# Altium PCB PCB1.PcbDoc
Units mm, origin at the board's own origin, x right, y up, seen from the top; angles counter-clockwise.
Board outline 40.64 x 48.39 mm, 2 copper layers (Top Layer, Bottom Layer); 40 components, 36 nets, 180 pads, 25 vias.
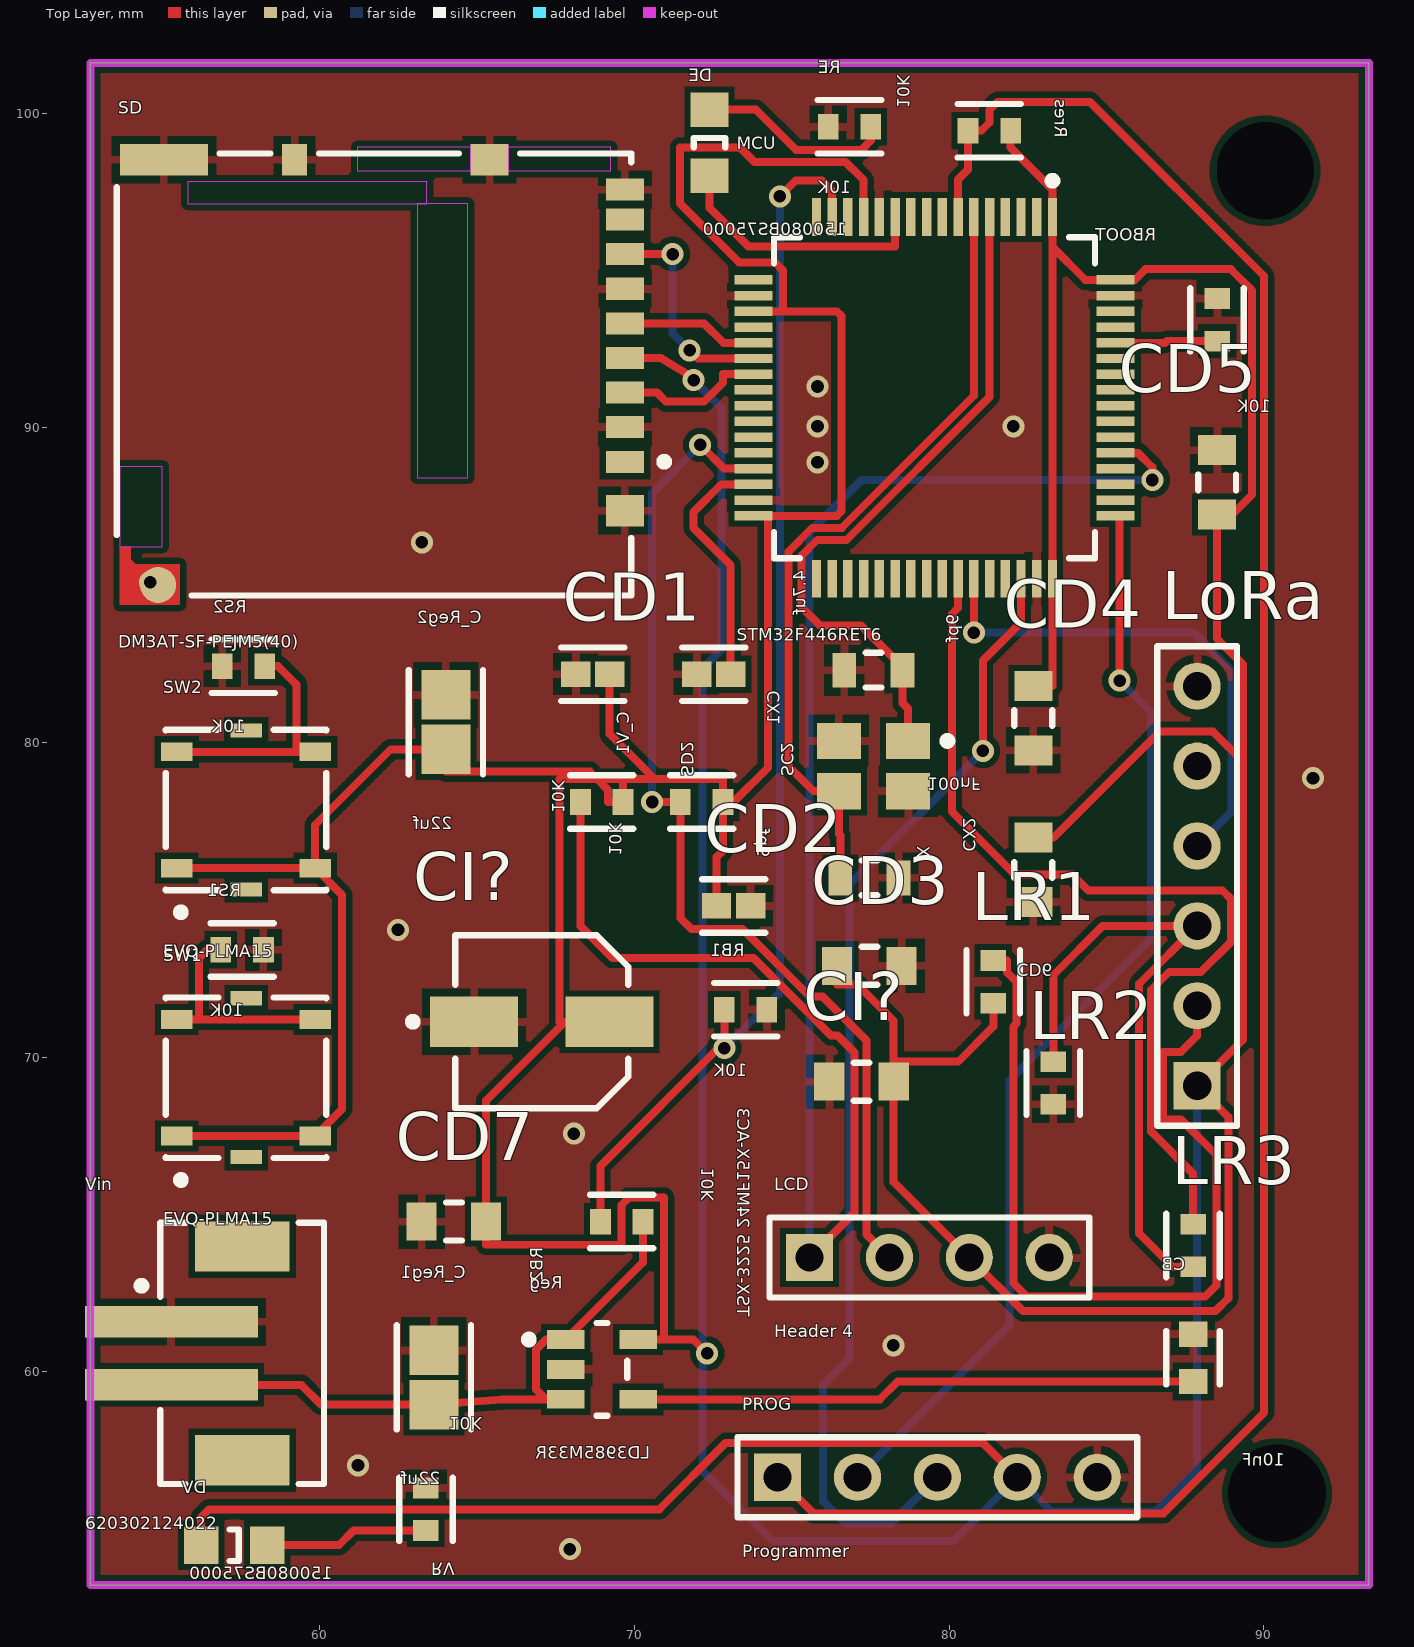
[diagram p0: Top Layer view]
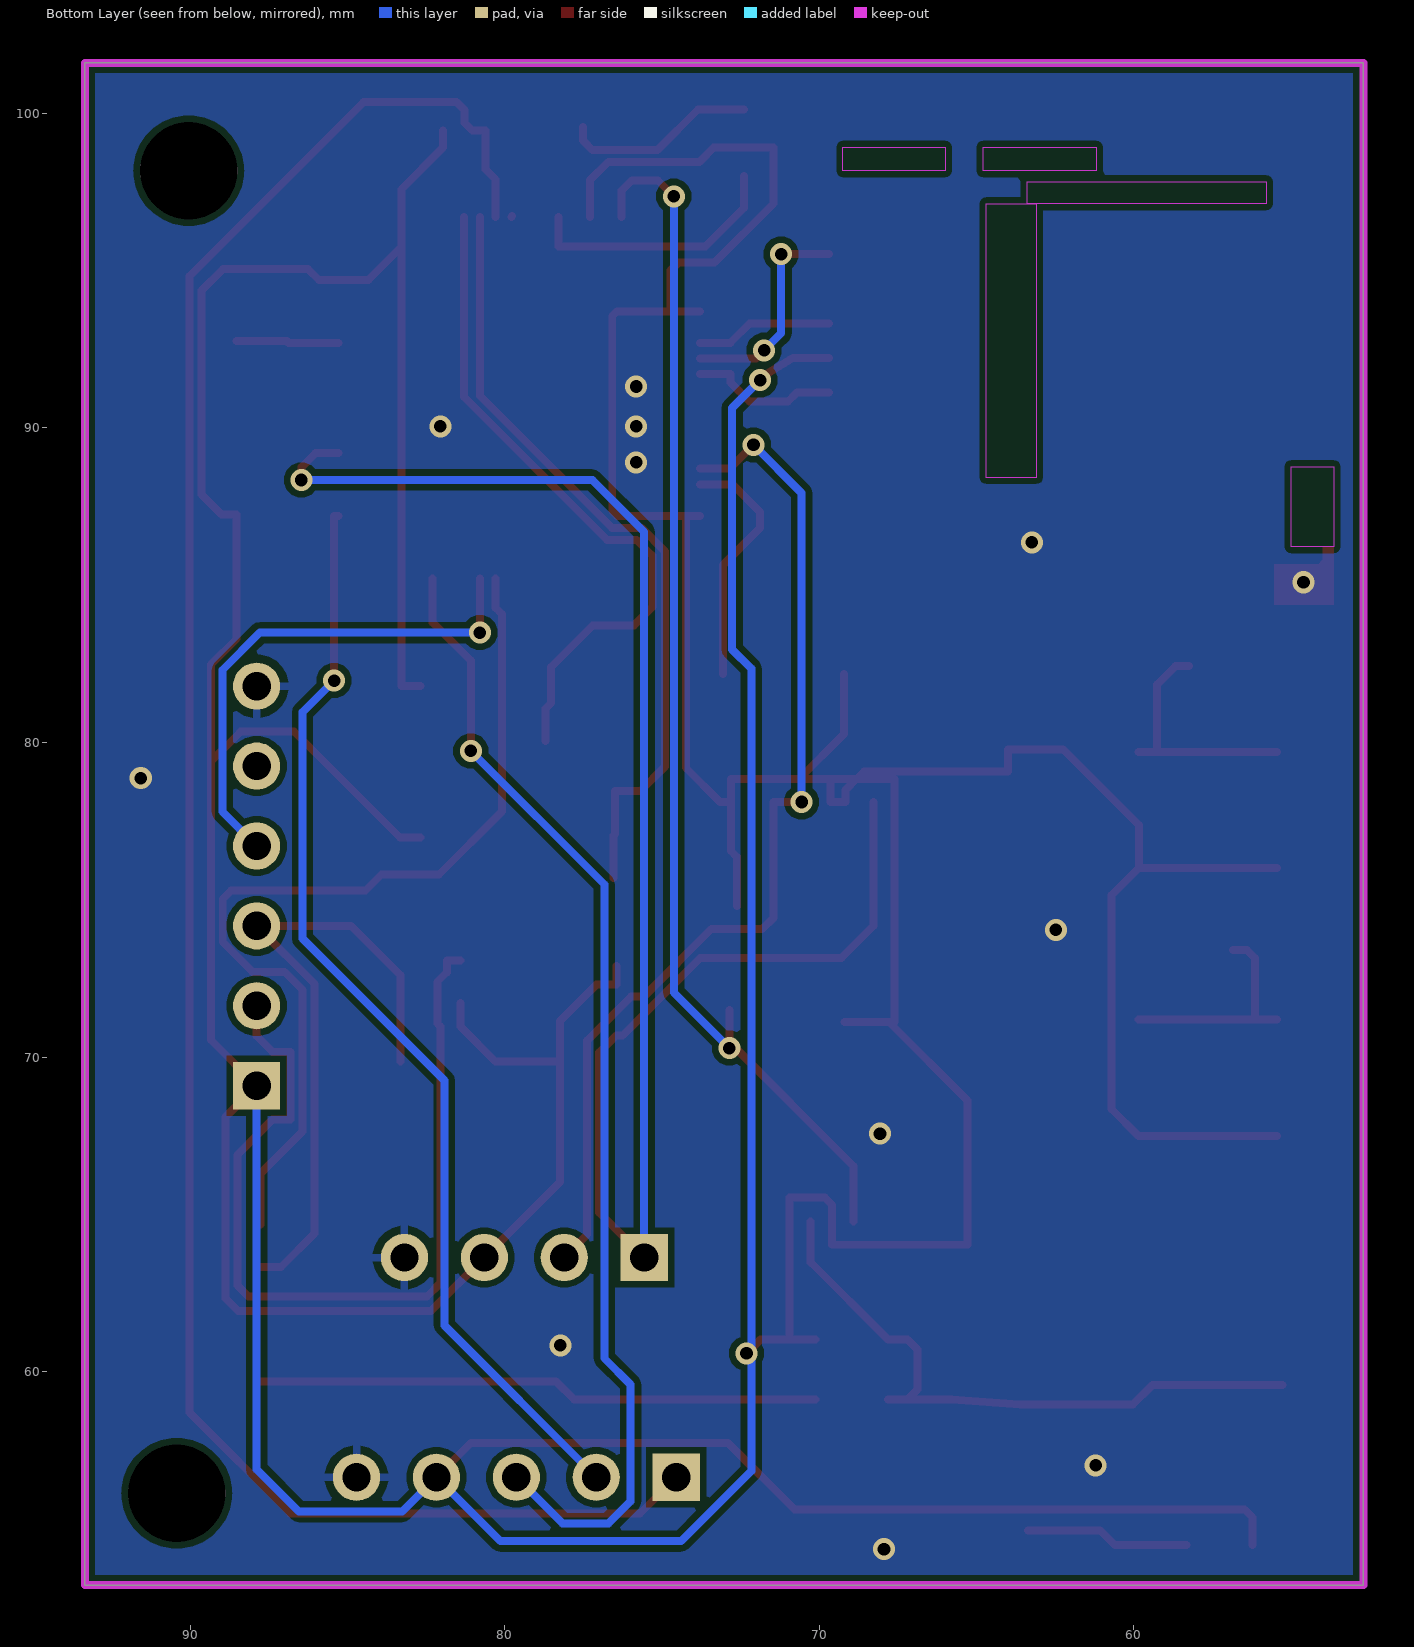
[diagram p1: Bottom Layer view, seen from below]
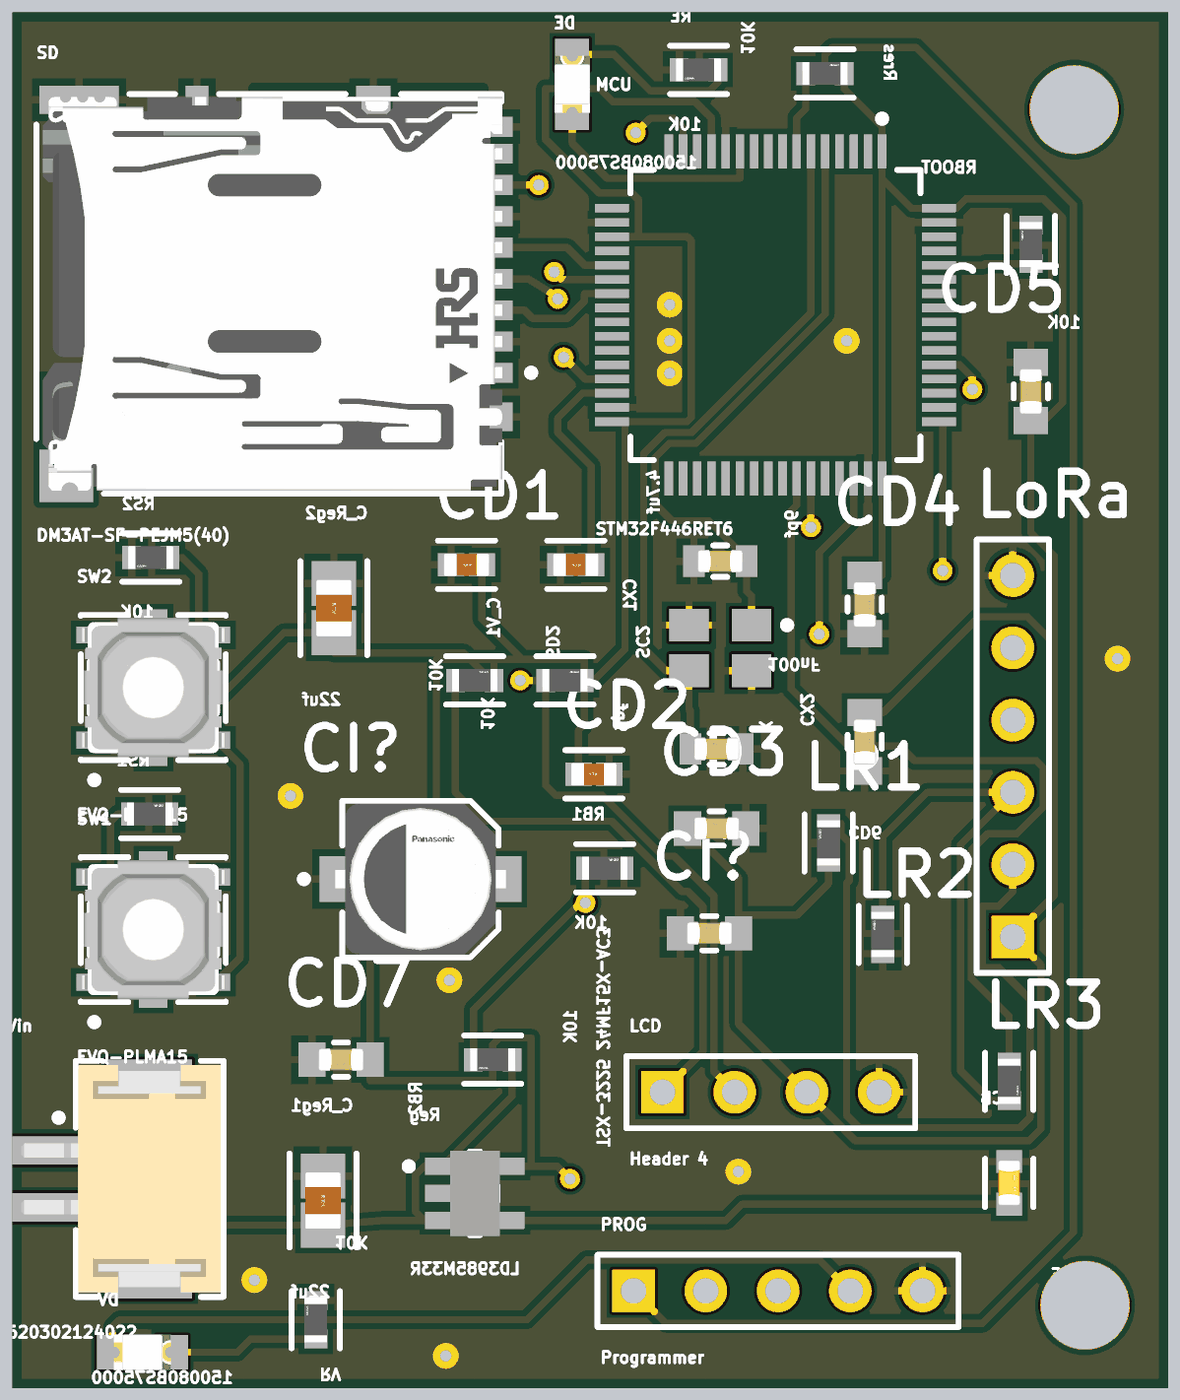
[diagram p2: 3D render of the assembled board from above, using the file's embedded part models]

## Layer stack, top to bottom
Top Solder: solder mask 0.0102, Solder Resist, Dk 3.5
Top Layer: signal copper 0.0356
Dielectric 1: dielectric 0.32, FR-4, Dk 4.8
Bottom Layer: signal copper 0.0356
Bottom Solder: solder mask 0.0102, Solder Resist, Dk 3.5

## Board outline
52.705,53.213 93.345,53.213 93.345,101.6 52.705,101.6

## Design rules (kind name [scope] priority, off if disabled: settings)
Clearance [All] p1: gap=0.2 ignorepadtopadclearanceinfootprint=FALSE except(0.127: Arc-Arc Arc-Track Track-Track SMDPad-SMDPad)
PolygonConnect [All] p1: connectstyle=Relief reliefconductorwidth=0.254 reliefentries=4 polygonreliefangle="90 Angle" airgapwidth=0.254
RoutingVias [All] p1: holewidth=0.4 width=0.7 viastyle="Through Hole" minholewidth=0.4 minwidth=0.7 maxholewidth=0.4 maxwidth=0.7
SolderMaskExpansion [All] p1: expansion=0.102 istentingtop=FALSE
Width [All] p1: maxlimit=0.5 minlimit=0.254 preferedwidth=0.254
30 further rules are at their usual default settings.

## Components (designator, comment, footprint, x,y, rotation, side; value= is the part's Value field where it differs from the comment)
C_Reg1 "22uf" FP-C2012-125-0_2-IPC_A 63.627,59.817 r270 top
C_Reg2 "22uf" FP-C2012-125-0_2-IPC_A 64.008,80.645 r270 top
C_V1 "4.7uf" FP-C1608-080-0_1-IPC_C 72.517,82.169 r180 top
CB "10nF" FP-CC0603-DA-MFG 87.757,60.44 r90 top value="10 nF"
CD1 "4.7uf" FP-C1608-080-0_1-IPC_C 68.674,82.169 r180 top
CD2 "4.7uf" FP-C1608-080-0_1-IPC_C 73.152,74.803 r0 top
CD3 "100nF" FP-CGA3E-0_3-0_1-IPC_A 77.47,72.898 r0 top
CD4 "100nF" FP-CGA3E-0_3-0_1-IPC_A 82.677,80.772 r270 top
CD5 "100nF" FP-CGA3E-0_3-0_1-IPC_A 88.519,88.265 r90 top
CD6 "100nF" FP-CGA3E-0_3-0_1-IPC_A 82.677,75.946 r270 top
CD7 "100nF" FP-CGA3E-0_3-0_1-IPC_A 64.262,64.77 r180 top
CI? "10uF" FP-SC-MFG 67.056,71.12 r0 top
CI? "100nF" FP-CGA3E-0_3-0_1-IPC_A 77.216,69.215 r0 top
CX1 "9pf" FP-CGA3E-0_3-0_1-IPC_B 77.597,82.296 r180 top
CX2 "9pf" FP-CGA3E-0_3-0_1-IPC_B 77.47,75.692 r0 top
DE "150080BS75000" 0805_A 72.39,99.06 r270 top
DV "150080BS75000" 0805_A 57.277,54.483 r180 top
LCD "Header 4" HDR1X4 75.565,63.627 r0 top
LoRa "Header 6" HDR1X6 87.884,69.088 r90 top
LR1 "10K" FP-RC0603-0_55-IPC_C 81.407,72.39 r90 top
LR2 "10K" FP-RC0603-0_55-IPC_C 83.312,69.173 r90 top
LR3 "4.7K" FP-RC0603-0_55-IPC_C 87.757,64.008 r270 top
MCU "STM32F446RET6" FP-LQFP64-5W-MFG 79.537,90.952 r270 top
PROG "Programmer" HDR1X5 74.549,56.642 r0 top
RB1 "10K" FP-RC0603-0_55-IPC_C 73.533,71.501 r0 top
RB2 "10K" FP-RC0603-0_55-IPC_C 69.596,64.77 r180 top
RBOOT "10K" FP-RC0603-0_55-IPC_C 88.519,93.43 r90 top
RE "10K" FP-RC0603-0_55-IPC_C 76.835,99.568 r180 top
Reg "LD3985M33R" FP-SOT23-5L-7049676-MFG 68.968,60.071 r0 top
Rres "10K" FP-RC0603-0_55-IPC_C 81.28,99.441 r0 top
RS1 "10K" FP-RC0603-0_55-IPC_C 57.531,73.406 r0 top
RS2 "10K" FP-RC0603-0_55-IPC_C 57.573,82.423 r180 top
RV "10K" FP-RC0603-0_55-IPC_C 63.373,55.626 r90 top
SC2 "10K" FP-RC0603-0_55-IPC_C 72.136,78.105 r0 top
SD "DM3AT-SF-PEJM5(40)" FP-DM3AT-SF-PEJM5_40-MFG 61.722,91.694 r270 top
SD2 "10K" FP-RC0603-0_55-IPC_C 68.961,78.105 r0 top
SW1 "EVQ-PLMA15" FP-EVQ-PLMA15-MFG 57.658,69.342 r90 top
SW2 "EVQ-PLMA15" FP-EVQ-PLMA15-MFG 57.658,77.851 r90 top
Vin "620302124022" 620302124022 57.531,60.579 r90 top
X "TSX-3225 24MF15X-AC3" EPSON-TSX-3225_V 77.597,79.248 r180 top

## Footprints (in the part's own frame and the unit in brackets; to place one, negate y for a bottom-side part, rotate by r counter-clockwise, add the part's x,y. Pads: shape width x height; smd on the part's side, far side on the other; paste and mask are expansions set on the pad)
0805_A [mm] "Chip LED, 2-Leads, Body 2.0x1.3mm, IPC Medium Density"
  rect 1.1x1.2 smd: 1(-1.05,0) 2(1.05,0)
  silkscreen extent -0.15,-0.5 0.15,0.5, body extent -1,-0.63 1,0.63, height 0.68
620302124022 [mm] "2.00mm SMT Male Vertical Shrouded Header, 2p"
  rect 1x5.5 smd: 1(1,2.25) 2(-1,2.25)
  rect 1.6x3 smd: MP1(-3.4,0) MP2(3.4,0)
  silkscreen extent -4.15,-2.6 4.15,3.32, body extent -4,-2.5 4,4.51, height 6.77
EPSON-TSX-3225_V [mm] "SMD, 4-Leads, Body 3.2x2.5mm"
  rect 1.4x1.15 smd: 1(-1.1,-0.8) 2(1.1,-0.8) 3(1.1,0.8) 4(-1.1,0.8)
  silkscreen extent -2.48,-0.92 -2.23,-0.68, body extent -1.6,-1.25 1.6,1.25, height 0.6
FP-C1608-080-0_1-IPC_C [mm]
  rect 0.931x0.812 smd paste+0 mask+0: 1(-0.541,0) 2(0.541,0)
  silkscreen extent -1.01,-0.85 1.01,0.85, body extent -0.8,-0.4 0.8,0.4, height 0.9
FP-C2012-125-0_2-IPC_A [mm]
  rect 1.578x1.556 smd paste+0 mask+0: 1(-0.864,0) 2(0.864,0)
  silkscreen extent -1.65,-1.18 1.65,1.18, body extent -1,-0.63 1,0.63, height 1.45
FP-CC0603-DA-MFG [mm]
  rect 0.8x0.9 smd paste+0 mask+0: 1(-0.75,0) 2(0.75,0)
  silkscreen extent -0.85,-0.85 0.85,0.85, body extent -0.8,-0.4 0.8,0.4, height 0.9
FP-CGA3E-0_3-0_1-IPC_A [mm]
  rect 0.956x1.206 smd paste+0 mask+0: 1(-1.025,0) 2(1.025,0)
  silkscreen extent -0.25,-0.6 0.25,0.6, body extent -2,-1.1 2,1.1, height 0.25
FP-CGA3E-0_3-0_1-IPC_B [mm]
  rect 0.756x1.106 smd paste+0 mask+0: 1(-0.925,0) 2(0.925,0)
  silkscreen extent -0.25,-0.55 0.25,0.55, body extent -0.8,-0.4 0.8,0.4, height 1.1
FP-DM3AT-SF-PEJM5_40-MFG [mm]
  rect 0.7x1.2 smd paste+0 mask+0: 1(2.775,7.975) 2(1.675,7.975) 3(0.575,7.975) 4(-0.525,7.975) 5(-1.625,7.975) 6(-2.725,7.975) 7(-3.825,7.975) 8(-4.925,7.975) 9(-5.875,7.975)
  rect 1x0.8 smd paste+0 mask+0: 10(-6.825,-2.525)
  rect 1x1.2 smd paste+0 mask+0: 11(4.325,7.975) 12(-6.825,3.675)
  rect 1x2.8 smd paste+0 mask+0: 13(-6.825,-6.675)
  round 1.145 smd paste+0 mask+0: 14(6.689,-6.861)
  Top Layer region: 6.025,-6.175 7.325,-6.175 7.325,-8.075 5.475,-8.075 5.475,-7.725 5.875,-7.725 6.025,-7.575 6.025,-6.175
  Keep-Out Layer region: -7.225,4.275 -6.475,4.275 -6.475,7.525 -7.225,7.525
  Keep-Out Layer region: -7.225,-0.525 -6.475,-0.525 -6.475,3.075 -7.225,3.075
  Keep-Out Layer region: -6.125,-5.925 -5.425,-5.925 -5.425,1.675 -6.125,1.675
  Keep-Out Layer region: -5.425,1.375 3.275,1.375 3.275,2.975 -5.425,2.975
  Keep-Out Layer region: 2.925,-8.075 5.475,-8.075 5.475,-6.725 2.925,-6.725
  silkscreen extent -7.02,-8.17 7.02,9.35, body extent -6.93,-7.95 6.92,8.2, height 1.68
FP-EVQ-PLMA15-MFG [mm]
  rect 0.45x1 smd paste+0 mask+0: 1(-2.525,0) 2(2.525,0)
  rect 0.6x1 smd paste+0 mask+0: A(-1.85,2.2) A'(-1.85,-2.2) B(1.85,2.2) B'(1.85,-2.2)
  silkscreen extent -3.37,-2.55 2.55,2.55, body extent -2.85,-2.8 2.85,2.8, height 0.25
FP-LQFP64-5W-MFG [mm]
  rect 1.2x0.3 smd paste+0 mask+0: 1(-5.75,3.75) 2(-5.75,3.25) 3(-5.75,2.75) 4(-5.75,2.25) 5(-5.75,1.75) 6(-5.75,1.25) 7(-5.75,0.75) 8(-5.75,0.25) 9(-5.75,-0.25) 10(-5.75,-0.75) 11(-5.75,-1.25) 12(-5.75,-1.75) 13(-5.75,-2.25) 14(-5.75,-2.75) 15(-5.75,-3.25) 16(-5.75,-3.75) 33(5.75,-3.75) 34(5.75,-3.25) 35(5.75,-2.75) 36(5.75,-2.25) 37(5.75,-1.75) 38(5.75,-1.25) 39(5.75,-0.75) 40(5.75,-0.25) 41(5.75,0.25) 42(5.75,0.75) 43(5.75,1.25) 44(5.75,1.75) 45(5.75,2.25) 46(5.75,2.75) 47(5.75,3.25) 48(5.75,3.75)
  rect 0.3x1.2 smd paste+0 mask+0: 17(-3.75,-5.75) 18(-3.25,-5.75) 19(-2.75,-5.75) 20(-2.25,-5.75) 21(-1.75,-5.75) 22(-1.25,-5.75) 23(-0.75,-5.75) 24(-0.25,-5.75) 25(0.25,-5.75) 26(0.75,-5.75) 27(1.25,-5.75) 28(1.75,-5.75) 29(2.25,-5.75) 30(2.75,-5.75) 31(3.25,-5.75) 32(3.75,-5.75) 49(3.75,5.75) 50(3.25,5.75) 51(2.75,5.75) 52(2.25,5.75) 53(1.75,5.75) 54(1.25,5.75) 55(0.75,5.75) 56(0.25,5.75) 57(-0.25,5.75) 58(-0.75,5.75) 59(-1.25,5.75) 60(-1.75,5.75) 61(-2.25,5.75) 62(-2.75,5.75) 63(-3.25,5.75) 64(-3.75,5.75)
  silkscreen extent -7.02,-5.1 5.1,5.1
FP-RC0603-0_55-IPC_C [mm]
  rect 0.659x0.812 smd paste+0 mask+0: 1(-0.677,0) 2(0.677,0)
  silkscreen extent -1.01,-0.85 1.01,0.85, body extent -1.11,-0.55 1.11,0.55, height 0.25
FP-SC-MFG [mm]
  rect 2.8x1.6 smd paste+0 mask+0: 1(-2.15,0) 2(2.15,0)
  silkscreen extent -4.22,-2.75 2.75,2.75, body extent -3.8,-3 3.8,3, height 0.25
FP-SOT23-5L-7049676-MFG [mm]
  rect 1.2x0.6 smd paste+0 mask+0: 1(-1.15,0.95) 2(-1.15,0) 3(-1.15,-0.95) 4(1.15,-0.95) 5(1.15,0.95)
  silkscreen extent -2.45,-1.47 0.8,1.47, body extent -0.87,-1.5 0.88,1.5, height 1.45
HDR1X4 [mm] "Connector; Header; 4 Position"
  rect 1.5x1.5 hole 0.9: 1(0,0)
  round 1.5 hole 0.9: 2(2.54,0) 3(5.08,0) 4(7.62,0)
  silkscreen extent -1.27,-1.27 8.89,1.27
HDR1X5 [mm] "Connector; Header; 5 Position"
  rect 1.5x1.5 hole 0.9: 1(0,0)
  round 1.5 hole 0.9: 2(2.54,0) 3(5.08,0) 4(7.62,0) 5(10.16,0)
  silkscreen extent -1.27,-1.27 11.43,1.27
HDR1X6 [mm] "Connector; Header; 6 Position"
  rect 1.5x1.5 hole 0.9: 1(0,0)
  round 1.5 hole 0.9: 2(2.54,0) 3(5.08,0) 4(7.62,0) 5(10.16,0) 6(12.7,0)
  silkscreen extent -1.27,-1.27 13.97,1.27

## Part data
C_Reg1 C_Reg2: library part CMP-08246-007072-1, "Multilayer Ceramic Capacitors 22μF ±20% 16V X6S SMD 0805", Capacitance=22uF, Case Code (Imperial)=0805, Case Code (Metric)=2012, Dielectric=X6S, Dielectric Material=Ceramic, Max Operating Temperature=105°C, Min Operating Temperature=-55°C, Package Quantity=2000, Tolerance=20%, Voltage Rating=16V, Case/Package=0805, Height=1.25mm, Lead Free="Lead Free", Length=0.079inch, Mount="Surface Mount", Packaging="Tape and Reel", REACH SVHC="No SVHC", RoHS Compliant=Yes, Series=C, Termination=SMD/SMT, Thickness=0.057inch, Voltage Rating (DC)=16V, Weight=0.000194oz, Width=0.049inch
C_V1 CD1 CD2: library part CMP-2000-04981-2, "Multilayer Ceramic Capacitors 4.7μF ±10% 16V X5R SMD 0603", Capacitance=4.7uF, Case Code (Imperial)=0603, Case Code (Metric)=1608, Dielectric=X5R, Dielectric Material=Ceramic, Max Operating Temperature=85°C, Min Operating Temperature=-55°C, Package Quantity=1, Tolerance=10%, Voltage=16V, Case/Package=0603, Construction=Flat, Depth=0.8mm, Height=0.8mm, Lead Free="Lead Free", Length=1.6mm, Mount="Surface Mount", Packaging="Tape and Reel", REACH SVHC="No SVHC", RoHS Compliant=Yes, Series=C, Termination=SMD/SMT, Thickness=0.035inch, Voltage Rating=16V, Voltage Rating (DC)=16V, Weight=7.1E-05oz, Width=0.031inch
CB: library part CMP-2100-03600-2, "CAP CER 10000PF 50V X7R 0603", Capacitance="10 nF", Manufacturer=YAGEO, Manufacturer Part Number=CC0603KRX7R9BB103, Package=CC0603-DA, Temperature="-55°C to +125°C", Temperature Characteristic=X7R, Temperature Coefficient=15%, Temperature Range High=+125°C, Temperature Range Low=-55°C, Tolerance=0.1, Voltage="50 V", Automotive=No, Category=Cap, ComponentLink2Description=Datasheet, ComponentLink2URL=http://www.yageo.com/documents/recent/UPY-GPHC_X7R_6.3V-to-50V_18.pdf, Device Class L1="Passive Components", Device Class L2=Capacitors, Device Class L3="Ceramic Capacitors", Digikey Description="CAP CER 10000PF 50V X7R 0603", Footprint Url=http://www.yageo.com/exep/pages/download/literatures/UPY-C_GEN_24.pdf, Height=0.9mm, Lead Free=Yes, Material=Ceramic, Mouser Description="Multilayer Ceramic Capacitor, CC Series, 0.01 - F, - 10%, X7R, 50 V, 0603 [1608 Metric]", Octopart=https://octopart.com/cc0603krx7r9bb103-yageo-192938, RoHS=TRUE, Voltage Rating="50 V"
CD3 CD4 CD5 CD6 CD7 CI?: library part CMP-2000-07546-2, "Cap Ceramic 100nF 50V X7R 10% Pad SMD 0603 +125°C Automotive T/R", Case Code (Imperial)=0603, Case Code (Metric)=1608, Dielectric=X7R, Max Operating Temperature=125°C, Min Operating Temperature=-55°C, Package Quantity=1, Ratings=AEC-Q200, Tolerance=10%, Voltage=50V, Capacitance=100nF, Case/Package=0603, Composition=Ceramic, Depth=0.8mm, Height=0.8mm, Lead Free="Lead Free", Length=1.6mm, Mount="Surface Mount", Packaging="Tape and Reel", Radiation Hardening=No, REACH SVHC="No SVHC", Termination=SMD/SMT, Thickness=0.035inch, Voltage Rating=50V, Voltage Rating (DC)=50V, Weight=7.1E-05oz, Width=0.8mm
CI?: library part CMP-05427-000087-1, "CAP ALUM 10UF 20% 35V SMD", Case/Package=Radial, Leakage Current=3uA, Max Operating Temperature=85°C, Min Operating Temperature=-40°C, Package Quantity=1, Ripple Current=30mA, Tolerance=20%, Voltage=35V, Capacitance=10uF, Construction=Cylindrical, Contact Plating=Tin, Diameter=5mm, Height=5.4mm, Height - Seated (Max)=0.213inch, Lead Length=2.2mm, Lead Pitch=1.5mm, Length=5.5mm, Life (Hours)=2000Hour, Mount="Surface Mount", Number of Pins=2, Packaging="Tape and Reel", Radiation Hardening=No, REACH SVHC="No SVHC", Ripple Current (AC)=30mA, RoHS Compliant=Yes, Series=S, Termination=SMD/SMT, Voltage Rating=35V, Voltage Rating (DC)=35V, Width=5.3mm
CX1 CX2: library part CMP-08246-000963-1, "Cap Ceramic 9pF 50V C0G 0.5pF Pad SMD 0603 +125°C Automotive T/R", Capacitance=9pF, Case Code (Imperial)=0603, Case Code (Metric)=1608, Dielectric=C0G, Max Operating Temperature=125°C, Min Operating Temperature=-55°C, Package Quantity=4000, Ratings=AEC-Q200, Voltage Rating=50V, Case/Package=0603, Composition=Ceramic, Depth=0.8mm, Height=0.8mm, Length=1.6mm, Mount="Surface Mount", Packaging="Tape and Reel", REACH SVHC="No SVHC", Termination=SMD/SMT, Thickness=0.035inch, Voltage Rating (DC)=50V, Weight=7.1E-05oz, Width=0.031inch
DE DV: library part CMP-1426-00008-1, "SMD mono-color Chip LED, WL-SMCW, Blue", Color=Blue, Manufacturer="Wuerth Elektronik", ComponentLink1Description="Manufacturer URL", ComponentLink1URL=http://www.we-online.com, ComponentLink2Description=Datasheet, ComponentLink2URL=http://katalog.we-online.com/led/datasheet/150080BS75000.pdf, PackageReference=0805_A, PartNumber=150080BS75000
LCD: "Header, 4-Pin", LatestRevisionDate=17-Jul-2002, LatestRevisionNote="Re-released for DXP Platform.", Publisher="Altium Limited"
LoRa: "Header, 6-Pin", LatestRevisionDate=17-Jul-2002, LatestRevisionNote="Re-released for DXP Platform.", Publisher="Altium Limited"
LR1 LR2 LR3 RB1 RB2 RBOOT RE Rres RS1 RS2 RV SC2 SD2: library part CMP-2100-03664-2, "RES 10K OHM 1% 1/10W 0603", Case Code (Imperial)=0603, Case Code (Metric)=1608, Max Operating Temperature=155°C, Max Power Dissipation=100mW, Min Operating Temperature=-55°C, Resistance=10kR, Resistance Tolerance=1%, Resistor Type="Thick Film", Temperature Coefficient=100ppm/°C, Voltage Rating=75V, Voltage Rating (DC)=50V, Case/Package=0603, Construction=Rectangular, Depth=0.8mm, Features="Moisture Resistant", Height=0.45mm, Lead Free="Lead Free", Lead Pitch=0.3mm, Length=1.6mm, Military Standard=Not, Number of Pins=2, Number of Terminations=2, Packaging="Tape and Reel", Power Rating=100mW, RoHS Compliant=Yes, Series=RC, Size Code=0603, Termination=SMD/SMT, Tolerance=1%, Weight=7.1E-05oz, Width=0.8mm
MCU: library part CMP-12105-000007-1, "IC MCU 32BIT 512KB FLASH 64LQFP", Ambient Temperature Range High=+85°C, Ambient Temperature Range Low=-40°C, Frequency=180MHz, Manufacturer=ST, Max Junction Temp=+105°C, Max Supply Voltage=3.6V, Min Supply Voltage=1.7V, Package=LQFP64-5W, Temperature="-40°C to +105°C", Automotive=No, Category=IC, ComponentLink2Description=Datasheet, ComponentLink2URL=https://www.st.com/en/microcontrollers-microprocessors/stm32f446re.html, Core Architecture="ARM Cortex-M4", Data Bus Width=32bits, Device Class L1="Integrated Circuits (ICs)", Device Class L2="Embedded Processors and Controllers", Device Class L3=Microcontrollers, Digikey Description="IC MCU 32BIT 512KB FLASH 64LQFP", Height=1.6mm, Interface=I2C,SPI,UART,USART,CAN,USB,LIN,IrDA,I2S,Other, Ipc Land Pattern Name=QFP50P1200X1200X160-64, Lead Free=Yes, Manufacturer Part Number=STM32F446RET6, Memory Size=512KBytes, Memory Type=FLASH, Mouser Description="ARM Microcontrollers - MCU High-performance and DSP with FP, ARM Cortex-M4 MCU with 512 Kbytes Flash, 180 MHz CPU, Art Accelerator, SDRAM", Number Of A/D Converters=3, Number Of Adc Channels=16, Number Of Cores=1, Number Of I2C Channels=4, Number Of I/Os=50, Number Of Pwm Channels=32, Number Of Spi Channels=4, Number Of Timers/Counters=14, Number Of Uart Channels=6, Number Of Usb Channels=2, Octopart=https://octopart.com/stm32f446ret6-stmicroelectronics-52642920, Ram Size=128KBytes, RoHS=TRUE, Standoff Height=0.05mm, Temperature Range High=+105°C, Temperature Range Low=-40°C
PROG: library part "Header 5", "Header, 5-Pin", LatestRevisionDate=17-Jul-2002, LatestRevisionNote="Re-released for DXP Platform.", Publisher="Altium Limited"
Reg: library part CMP-0244-00328-2, "IC REG LINEAR 3.3V 150MA SOT23-5", Case/Package=SOT-23, Dropout Voltage=60mV, Input Bias Current=85uA, Max Input Voltage=6V, Max Operating Temperature=125°C, Max Output Current=150mA, Min Current Limit=300mA, Min Input Voltage=2.5V, Min Operating Temperature=-40°C, Min Output Voltage=3.3V, Output Voltage Accuracy=2%, Package Quantity=1, Quiescent Current=150uA, Accuracy=2%, Height=1.3mm, Lead Free="Lead Free", Length=3mm, Mount="Surface Mount", Number Of Outputs=1, Number of Pins=5, Number of Regulators=1, Output Current=150mA, Output Type=Fixed, Output Voltage=3.3V, Packaging="Tape and Reel", Polarity=Positive, Radiation Hardening=No, Width=1.75mm
SD: library part CMP-11597-000006-1, "CONN MICRO SD R/A PUSH-PUSH SMD", Color=Black, Contact Resistance=100mR, Current Rating=500mA, Flammability Rating="UL94 V-0", Insulation Resistance=1GR, Max Operating Temperature=85°C, Max Voltage Rating (AC)=125V, Min Operating Temperature=-25°C, Package Quantity=400, Connector Type=Connector, Contact Material="Copper Alloy", Contact Plating=Gold, Depth=15.95mm, Gender=Receptacle, Housing Material=Polymer, Lead Free="Lead Free", Length=13.85mm, Mating Cycles=10000, Max Current Rating=500mA, Mount="Surface Mount", Number of Contacts=8, Number of Rows=2, Orientation="Right Angle", Packaging="Tape and Reel", Pitch=1.1mm, Radiation Hardening=No, REACH SVHC="No SVHC", Series=DM3, Termination=Solder, Voltage Rating=125V, Voltage Rating (AC)=125V, Width=13.85mm
SW1 SW2: library part CMP-05618-000006-1, "SWITCH TACTILE SPST-NO 0.02A 15V", Contact Current Rating=20mA, Contact Resistance=50mΩ, Manufacturer="Panasonic Electronic Components", Operating Force=2.6N, Package=0, Temperature="-20°C to +70°C", Temperature Range High=+70°C, Temperature Range Low=-20°C, Voltage Rating Dc=15V, Automotive=No, Category=Switch, ComponentLink2Description=Datasheet, ComponentLink2URL=https://datasheet.ciiva.com/8164/atv0000ce2-8164994.pdf, Device Class L1=Electromechanical, Device Class L2=Switches, Device Class L3="Tactile Switches", Digikey Description="SWITCH TACTILE SPST-NO 0.02A 15V", Electromechanical Life=200000Cycles, Height=1.7mm, Lead Free=Yes, Manufacturer Part Number=EVQ-PLMA15, Mount="Surface Mount", Mouser Description="Tactile Switches FLAT ACT 2.6NF 4.6x3.4x1.5mm", Octopart=https://octopart.com/evq-plma15-panasonic-39850235, RoHS=TRUE, Throw Configuration=SPST-NO
Vin: library part CMP-1502-00660-1, "Male Shrouded Header WR-WTB, SMT, Vertical, pitch 2 mm, 1 x 2 position", Contact Resistance=20mOhm, Manufacturer="Wurth Elektronik", Operating Temperature=-25to85degC, Working Voltage=100VAC, Datasheet URL=https://katalog.we-online.de/em/datasheet/6203xx124022.pdf, Gender=Male, Manufacturer URL=http://www.we-online.de, Mounting Technology=SMT, Orientation=Vertical, Package Reference=620302124022, Packaging=TapeandReel, Part Number=620302124022, Pitch=2mm, Position=1x2, Publisher=WurthElektronik
X: library part CMP-2000-07333-1, "MHz Range Crystal, 24 MHz, -40 to 85 degC, 4-Pin SMD, RoHS, Tape and Reel", Frequency=24MHz, Frequency Stability=10PPM, Load Capacitance=9pF, Manufacturer=Epson, Operating Temperature Range=-40Cto+85C, Package / Case=3.2mmx2.5mm, Package Description="4-Pin Surface Mount Device, Body 3.2 x 2.5 mm", Package Reference=TSX-3225, Brand=EpsonTiming, Datasheet URL=https://support.epson.biz/td/api/doc_check.php?dl=brief_FA-238V_en.pdf, Datasheet Version=12/2015, Drive Level=200uW, ESR=40Ohms, Factory Pack Quantity=250, Height=0.6mm, Length=3.2mm, Manufacturer URL=https://www.eea.epson.com/, Mounting Style=SMD/SMT, Mounting Technology=SurfaceMount, Packaging=Reel, Product Category=Crystals, RoHS=True, Series=TSX-3225, Termination Style=SMD/SMT, Tolerance=10PPM, Type=Crystal, Unit Weight=0.000564oz, Width=2.5mm

## Free pads (board coordinates)
  oval 3.1x1.524 hole 3.1: 1(90.043,98.171) 1(90.424,56.134)

## Via types
v1: diameter 0.7, hole 0.4, Top Layer to Bottom Layer, 25 vias

## Nets (pads, with @x,y where several pads share a name; then routed paths per layer and width w, separated by ;. In a path a pad name is that pad's centre, name@x,y a point inside that pad or via, vN(x,y) a via of type N, cw(c..) or ccw(c..) an arc to the next point about the centre after c; other vN are vias at no path point)
+3V3: C_Reg2.2 CD1.1 CD2.1 CD3.1 CD4.1 CD5.1 CD6.1 CD7.1 CI?.2 DV.2 LCD.3 LoRa.1 LR1.1 MCU.1 MCU.13 MCU.19 MCU.32 MCU.48 MCU.64 PROG.4 Reg.5 Rres.2 SC2.2 SD2.2 SD.4 SW1.A SW1.A' SW2.A SW2.A' | length 303.6
  Top Layer w0.254: SW1.A SW1.A' 60.706,68.34 60.706,75.153 SW2.A' SW2.A'@59.842,76.001 ; SW2.A SW2.A'@59.842,76.001 ; DV.2 56.227,55.372 56.481,55.626 70.79,55.626 72.898,57.734 81.077,57.734 PROG.4 ; CI?.2@69.206,71.12 67.793,71.12 ; CD1.1 69.215,80.264 70.637,78.842 ; SD.4 70.841,92.219 71.704,91.694 v1(71.882,91.516) ; Reg.5 70.942,61.021 ; v1(72.314,60.579) 71.872,61.021 70.942,61.021 ; CD2.1 72.611,76.352 72.813,76.554 SC2.2 ; MCU.32 MCU.32@74.244,87.202 ; MCU.19 74.727,93.702 ; CD3.1 76.445,72.304 77.083,72.304 78.241,71.146 78.241,69.85 ; MCU.13 77.287,97.871 76.708,98.45 73.812,98.45 73.355,98.908 71.45,98.908 71.45,97.13 73.33,95.25 74.473,95.25 74.727,94.996 74.727,93.702 ; LR1.1 81.407,70.968 80.289,69.85 78.241,69.85 ; Rres.2 81.957,98.908 83.287,97.578 MCU.1 83.287,95.743 ; CD6.1 83.321,76.971 86.69,80.34 88.392,80.34 89.342,79.39 ; CD4.1 83.287,81.797 MCU.48 83.287,95.743 ; SW2.A'@59.842,76.001 59.842,77.368 62.255,79.781 C_Reg2.2 64.008,79.07 68.58,79.07 68.809,78.842 ; 67.793,71.12 67.615,71.12 67.615,78.842 68.809,78.842 ; 67.793,71.12 65.287,68.614 CD7.1 65.287,64.033 69.596,64.033 69.596,65.303 69.825,65.532 70.942,65.532 70.942,61.021 ; 68.809,78.842 69.638,78.842 ; 68.809,78.842 69.164,78.486 69.164,78.105 SD2.2 69.638,78.842 ; 69.638,78.842 70.637,78.842 ; 70.637,78.842 72.813,78.842 SC2.2 ; SC2.2 73.152,78.105 74.244,79.197 MCU.32@74.244,87.202 ; MCU.32@74.244,87.202 76.432,87.202 76.581,87.351 76.581,93.553 76.432,93.702 74.727,93.702 ; 78.241,69.85 78.241,69.215 78.241,66.031 LCD.3 82.347,61.925 88.468,61.925 88.875,62.332 88.875,68.097 LoRa.1 89.342,70.546 89.342,79.39 ; 83.287,95.743 84.328,94.702 MCU.64 85.908,94.702 86.248,95.041 88.956,95.041 89.637,94.361 89.637,87.875 89.002,87.24 CD5.1 88.519,83.297 89.342,82.474 89.342,79.39
  Bottom Layer w0.254: v1(71.882,91.516) 72.771,90.627 72.771,82.956 72.161,82.347 v1@72.161,60.579 ; v1(72.314,60.579) v1@72.161,60.579 ; LoRa.1 87.884,56.896 86.538,55.55 83.261,55.55 PROG.4 80.137,54.61 74.397,54.61 72.161,56.845 v1@72.161,60.579
ADC0: MCU.15 RB1.1 RB2.2 | length 39.2
  Top Layer w0.254: RB2.2 68.919,66.539 v1@72.856,70.476 ; v1(72.856,70.282) v1@72.856,70.476 ; RB1.1 v1@72.856,70.476 ; v1(74.625,97.358) 75.133,97.866 75.957,97.866 76.287,97.536 MCU.15
  Bottom Layer w0.254: v1(72.856,70.282) 74.625,72.051 v1(74.625,97.358)
GND: C_Reg1.1 C_Reg2.1 C_V1.2 CB.2 CD1.2 CD2.2 CD3.2 CD4.2 CD5.2 CD6.2 CD7.2 CI?.1 CX1.2 CX2.2 LCD.4 LoRa.6 LR2.1 MCU.12 MCU.18 MCU.31 MCU.47 MCU.63 PROG.5 RB1.2 RBOOT.2 RE.2 Reg.2 RS1.2 RS2.2 RV.2 SD.2 SD.6 SD.9 SD.10 SD.11 SD.12 SD.13 SD.14 Vin.1 X.2 X.4
  other v1: 67.945,54.356 67.945,54.356 61.214,57.023 78.232,60.833 68.072,67.564 62.484,74.041 91.567,78.867 54.61,85.09 63.246,86.36 75.819,88.9 75.819,90.043 82.042,90.043 75.819,91.313
INDICATOR: DE.2 MCU.11 | length 8.4
  Top Layer w0.254: DE.2 72.39,96.992 73.624,95.758 78.287,95.758 MCU.11
"INT 1": MCU.26
"INT 2": MCU.27
"INT 3": MCU.28
"INT 4": MCU.55
"INT 5": MCU.56
M_boot: MCU.60 RBOOT.1 | length 3.3
  Top Layer w0.254: MCU.60 86.868,92.702 86.92,92.754 RBOOT.1
M_C_V: C_V1.1 MCU.30 | length 7.9
  Top Layer w0.254: C_V1.1 73.058,85.64 71.882,86.816 71.882,87.324 72.76,88.202 MCU.30
M_X1: CX1.1 MCU.5 X.1 | length 21.8
  Top Layer w0.254: X.1 78.697,81.077 78.522,81.252 CX1.1 78.522,82.398 77.201,83.718 75.895,83.718 75.308,84.306 75.308,85.935 75.813,86.44 76.748,86.44 81.287,90.979 MCU.5
M_X2: CX2.1 MCU.6 X.3 | length 25.1
  Top Layer w0.254: CX2.1 76.545,77.038 76.497,77.086 X.3 75.692,78.448 74.905,79.235 74.905,86.071 75.655,86.821 76.59,86.821 80.787,91.018 MCU.6
MISO: MCU.22 SD.7 | length 6.9
  Top Layer w0.254: SD.7 v1(71.213,95.519) ; v1(71.755,92.463) 72.016,92.202 MCU.22
  Bottom Layer w0.254: v1(71.213,95.519) 71.213,93.005 v1(71.755,92.463)
MOSI: MCU.23 SD.3 | length 4.7
  Top Layer w0.254: SD.3 70.714,91.119 71.002,90.83 72.212,90.83 72.822,91.44 72.822,91.702 MCU.23
NetCB_1: CB.1 Reg.4 | length 17.9
  Top Layer w0.254: Reg.4 77.8,59.121 78.369,59.69 CB.1
NetDE_1: DE.1 RE.1 | length 6.2
  Top Layer w0.254: DE.1 73.863,100.11 75.142,98.831 77.216,98.831 77.512,99.127 RE.1
NetDV_1: DV.1 RV.1 | length 5.2
  Top Layer w0.254: DV.1 60.604,54.483 61.071,54.949 RV.1
NetLoRa_2: LoRa.2 LR1.2 | length 28.3
  Top Layer w0.254: LR1.2 81.839,73.067 81.839,72.691 82.14,72.39 82.14,71.069 82.042,70.971 82.042,62.814 82.474,62.382 88.138,62.382 88.494,62.738 88.494,66.893 87.376,68.011 86.807,68.011 86.807,70.165 87.376,70.165 87.884,70.673 LoRa.2
NetLoRa_3: LoRa.3 LR2.2 LR3.2 | length 20.7
  Top Layer w0.254: LR2.2 83.312,72.601 84.879,74.168 LoRa.3 86.045,72.329 86.045,64.389 87.103,63.331 LR3.2
NRST: MCU.7 PROG.1 Rres.1 | length 68.6
  Top Layer w0.254: PROG.1 75.692,55.499 86.817,55.499 90.018,58.699 90.018,94.818 84.48,100.355 81.534,100.355 81.28,100.101 81.28,99.695 81.026,99.441 Rres.1 80.603,98.208 80.287,97.892 MCU.7
RX: LoRa.4 MCU.43 | length 16.4
  Top Layer w0.254: v1(80.787,83.49) MCU.43
  Bottom Layer w0.254: v1(80.787,83.49) 87.782,83.49 88.976,82.296 88.976,77.8 LoRa.4
S1: RS1.1 SW1.B SW1.B' | length 7.2
  Top Layer w0.254: SW1.B 56.159,71.192 ; RS1.1 56.413,73.406 56.159,73.152 56.159,71.192 ; SW1.B' 56.159,71.192
S2: RS2.1 SW2.B SW2.B' | length 7.8
  Top Layer w0.254: SW2.B 59.262,79.701 ; RS2.1 58.674,82.423 59.262,81.835 59.262,79.701 ; SW2.B' 59.262,79.701
SA_IMU: MCU.50
SCK: MCU.21 SD.5 | length 4.3
  Top Layer w0.254: SD.5 72.212,93.319 72.829,92.702 MCU.21
SCL1: MCU.61
SCL2: LCD.2 MCU.29 SC2.1 | length 33.3
  Top Layer w0.254: v1(70.561,78.105) SC2.1 71.459,74.422 71.815,74.066 73.431,74.066 75.575,71.923 75.98,71.923 77.377,70.526 77.377,64.355 LCD.2 ; v1(72.09,89.459) 72.847,88.702 MCU.29
  Bottom Layer w0.254: v1(70.561,78.105) 70.561,87.93 v1(72.09,89.459)
SCL3: MCU.41
SDA1: MCU.62
SDA2: LCD.1 MCU.53 SD2.1 | length 57.8
  Top Layer w0.254: SD2.1 68.284,74.168 69.3,73.152 73.784,73.152 76.248,70.688 76.453,70.688 76.996,70.145 76.996,65.058 LCD.1 ; MCU.53 86.007,89.202 86.462,88.748 v1(86.462,88.341)
  Bottom Layer w0.254: LCD.1 75.565,86.69 77.216,88.341 v1(86.462,88.341)
SDA3: MCU.40
SWCLK: MCU.49 PROG.2 | length 35
  Top Layer w0.254: MCU.49 85.42,87.202 v1(85.42,81.966)
  Bottom Layer w0.254: PROG.2 81.915,61.468 81.915,69.253 86.426,73.764 86.426,80.96 v1(85.42,81.966)
SWDIO: MCU.46 PROG.3 | length 36.5
  Top Layer w0.254: v1(81.077,79.731) 81.077,82.6 82.287,83.811 MCU.46
  Bottom Layer w0.254: PROG.3 78.156,55.169 76.708,55.169 75.997,55.88 75.997,59.588 76.835,60.427 76.835,75.489 v1(81.077,79.731)
TX: LR3.1 MCU.42 | length 30
  Top Layer w0.254: MCU.42 80.287,84.277 80.086,84.076 80.086,77.8 82.093,75.794 83.922,75.794 84.43,75.286 88.697,75.286 88.961,75.021 88.961,73.66 88.011,72.71 87,72.71 86.426,72.136 86.426,67.63 87.757,66.299 LR3.1
Vin: C_Reg1.2 RB2.1 Reg.1 Reg.3 Vin.2 | length 20.4
  Top Layer w0.254: Vin.2 59.411,59.579 60.037,58.953 C_Reg1.2 65.802,59.121 67.193,59.121 ; Reg.3 67.193,59.121 ; RB2.1 70.273,63.476 Reg.1 67.193,61.021 66.878,60.706 66.878,59.436 67.193,59.121
pads on no net: LoRa.5 MCU.2 MCU.3 MCU.4 MCU.8 MCU.9 MCU.10 MCU.14 MCU.16 MCU.17 MCU.20 MCU.24 MCU.25 MCU.33 MCU.34 MCU.35 MCU.36 MCU.37 MCU.38 MCU.39 MCU.44 MCU.45 MCU.51 MCU.52 MCU.54 MCU.57 MCU.58 MCU.59 SD.1 SD.8 SW1.1 SW1.2 SW2.1 SW2.2 Vin.MP1 Vin.MP2
copper on no net: | length 0
  Top Layer w0.254: 79.764,96.725 79.787,96.702

## Polygon pours and split planes (outlines as drawn)
GND on Top Layer "GND_L01_P000" (solid, remove dead copper, pour order 0): 49.276,103.124 49.657,102.743 95.885,102.743 95.885,52.832 93.726,50.673 92.583,51.816 50.165,51.816
GND on Bottom Layer "GND_L02_P001" (solid, remove dead copper, pour order 1): 49.784,103.124 51.308,101.6 96.393,101.6 96.393,53.594 94.869,52.07 52.832,52.07 51.435,53.467

## Keep-outs
Keep-Out Layer:
  lines w0.254: 52.705,53.213 93.345,53.213 93.345,73.406 93.345,101.6 52.705,101.6 52.705,53.213